# EAGLE board 2 (EAGLE 9.2.0)

Size 48.2 x 28 mm. Coordinates in mm from the lower left corner, seen from the top.
Outline: 0,0 48.2,0 48.2,28 0,28 0,0
Copper layers (1*16): Top 0.035mm / dielectric 1.5mm / Bottom 0.035mm
Design rules "default": minimum track width 6mil, minimum drill 0.35mm, track to track 6mil, track to pad 6mil, pad to pad 6mil, via to via 6mil, smd to smd 6mil, copper to edge 40mil, drill to drill 6mil, minimum pad ring 10mil, minimum via ring 8mil, stop-mask expansion 4mil, vias tented up to drill 0mil, thermal gap 10mil

## Footprints (pad centres in the part's own frame; a part is rotated, then mirrored left to right if it is on the bottom)
CAP-PTH-SMALL-KIT = drill 1.016 pad 2.032: 1 -1.397,0; 2 1.397,0
C2.5-3 = drill 0.813 pad 1.6 octagon: 1 -1.27,0; 2 1.27,0
QFN50P600X600X100-41N = smd 0.85 x 0.25: 1 -2.95,2.25; 2 -2.95,1.75; 3 -2.95,1.25; 4 -2.95,0.75; 5 -2.95,0.25; 6 -2.95,-0.25; 7 -2.95,-0.75; 8 -2.95,-1.25; 9 -2.95,-1.75; 10 -2.95,-2.25; 21 2.95,-2.25; 22 2.95,-1.75; 23 2.95,-1.25; 24 2.95,-0.75; 25 2.95,-0.25; 26 2.95,0.25; 27 2.95,0.75; 28 2.95,1.25; 29 2.95,1.75; 30 2.95,2.25 | smd 0.25 x 0.85: 11 -2.25,-2.95; 12 -1.75,-2.95; 13 -1.25,-2.95; 14 -0.75,-2.95; 15 -0.25,-2.95; 16 0.25,-2.95; 17 0.75,-2.95; 18 1.25,-2.95; 19 1.75,-2.95; 20 2.25,-2.95; 31 2.25,2.95; 32 1.75,2.95; 33 1.25,2.95; 34 0.75,2.95; 35 0.25,2.95; 36 -0.25,2.95; 37 -0.75,2.95; 38 -1.25,2.95; 39 -1.75,2.95; 40 -2.25,2.95 | smd 4.15 x 4.15: 41 0,0
1X1-HEADER-HOLE = drill 1.016 pad 1.778: 1 0,0
0204V = drill 0.813 octagon: 1 -1.27,0; 2 1.27,0

## Placement (x,y rotation side)
C1  1 uF  [CAP-PTH-SMALL-KIT]  22.57,14.98 180 top
C3  1 uF  [CAP-PTH-SMALL-KIT]  43.68,19.27 0 top
C4  0.1 uF  [CAP-PTH-SMALL-KIT]  43.73,16.39 0 top
C5  0.1 uF  [CAP-PTH-SMALL-KIT]  43.73,13.51 0 top
C6  0.1 uF  [CAP-PTH-SMALL-KIT]  43.73,10.68 0 top
C7  0.1 uF  [CAP-PTH-SMALL-KIT]  43.73,7.85 0 top
C8  0.1 uF  [CAP-PTH-SMALL-KIT]  43.73,5.12 180 top
C9  0.1 uF  [CAP-PTH-SMALL-KIT]  43.73,2.29 0 top
C10  1 uF  [CAP-PTH-SMALL-KIT]  22.44,11.93 180 top
C11  1 uF  [CAP-PTH-SMALL-KIT]  28.26,12.38 180 top
C12  150 pF  [CAP-PTH-SMALL-KIT]  19.35,22.11 180 top
C13  150 pF  [CAP-PTH-SMALL-KIT]  19.77,19.22 0 top
C14  0.022 uF  [CAP-PTH-SMALL-KIT]  21.24,8.95 180 top
C15  0.022 uF  [CAP-PTH-SMALL-KIT]  28.04,15.03 0 top
C16  1 uF  [CAP-PTH-SMALL-KIT]  25.34,21.98 180 top
C17  1 uF  [CAP-PTH-SMALL-KIT]  37.45,13.63 0 top
C18  10 nF  [CAP-PTH-SMALL-KIT]  33.07,15.53 270 top
C19  1uF  [C2.5-3]  17.85,6.8 180 top
IC1  CS43L22-CNZ  [QFN50P600X600X100-41N]  10.86,11.23 45 top
JP1  [1X1-HEADER-HOLE]  1.91,2.22 0 top
JP2  [1X1-HEADER-HOLE]  4.41,2.23 0 top
JP3  [1X1-HEADER-HOLE]  10.06,24.63 0 top
JP4  [1X1-HEADER-HOLE]  7.51,24.64 0 top
JP5  [1X1-HEADER-HOLE]  4.91,24.6 0 top
JP6  [1X1-HEADER-HOLE]  2.31,24.61 0 top
JP7  [1X1-HEADER-HOLE]  15.41,24.66 0 top
JP8  [1X1-HEADER-HOLE]  41.03,25.38 0 top
JP9  [1X1-HEADER-HOLE]  38.48,25.47 0 top
JP10  [1X1-HEADER-HOLE]  6.96,2.19 0 top
JP11  [1X1-HEADER-HOLE]  9.46,2.2 0 top
JP12  [1X1-HEADER-HOLE]  12.01,2.21 0 top
JP13  [1X1-HEADER-HOLE]  14.56,2.22 0 top
JP14  [1X1-HEADER-HOLE]  33.33,25.45 0 top
JP15  [1X1-HEADER-HOLE]  30.68,25.39 0 top
JP16  [1X1-HEADER-HOLE]  22.98,25.18 0 top
JP17  [1X1-HEADER-HOLE]  28.18,25.27 0 top
JP18  [1X1-HEADER-HOLE]  35.88,25.46 0 top
JP19  [1X1-HEADER-HOLE]  12.66,24.72 0 top
JP20  [1X1-HEADER-HOLE]  25.58,25.36 0 top
JP21  [1X1-HEADER-HOLE]  17.11,2.23 0 top
JP22  [1X1-HEADER-HOLE]  19.71,2.24 0 top
JP23  [1X1-HEADER-HOLE]  43.68,25.49 0 top
JP24  [1X1-HEADER-HOLE]  46.23,25.35 0 top
R2  51R  [0204V]  3.35,15.75 0 top
R4  100 ohm  [0204V]  14.02,18.68 0 top
R5  48R  [0204V]  19.08,25.77 0 top
R6  100 Kohm  [0204V]  19.22,24.46 0 top
R7  100 ohm  [0204V]  24.45,2.55 0 top
R8  1.2 Kohm  [0204V]  31.83,10.58 180 top
R9  100 Kohm  [0204V]  30.58,5.41 270 top
R10  55R  [0204V]  26.2,10.23 180 top
R11  49R  [0204V]  25.36,5.88 180 top
R12  51R  [0204V]  25.65,16.75 180 top
R13  10k  [0204V]  3.4,19.45 0 top

## Library data of the parts
C1 C3-C18 JP1-JP24 = F405Pill
C19 = capacitor-wima
IC1 = CS43L22-CNZ; DESCRIPTION: CS43L22-CNZ, Audio DAC 24 bit-, 96ksps Serial, 40-Pin QFN; HEIGHT: 1mm; MANUFACTURER_NAME: Cirrus Logic; MANUFACTURER_PART_NUMBER: CS43L22-CNZ; MOUSER_PART_NUMBER: 777-CS43L22-CNZ; MOUSER_PRICE-STOCK: https://www.mouser.com/Search/Refine.aspx?Keyword=777-CS43L22-CNZ; RS_PART_NUMBER: 7165851P; RS_PRICE-STOCK: http://uk.rs-online.com/web/p/products/7165851P
R2 R4-R13 = rcl; SPICEPREFIX: R

## Nets
3.3V: C3.2 C4.2 C5.2 C6.2 C7.2 C8.1 C9.2 IC1.5 IC1.8 IC1.13 IC1.16 IC1.33 IC1.34 JP24.1
GND: C1.1 C3.1 C4.1 C5.1 C6.1 C7.1 C8.2 C9.1 C10.2 C11.2 C12.1 C13.2 C18.1 IC1.3 IC1.17 IC1.31 IC1.35 IC1.41 JP8.1 JP9.1 JP23.1 R2.2 R6.1 R9.2 R12.2 R13.2
N$1: C19.2 IC1.11
N$2: IC1.1 JP1.1
N$3: IC1.2 JP2.1
N$4: IC1.37 JP3.1
N$5: IC1.38 JP4.1
N$6: IC1.39 JP5.1
N$7: IC1.40 JP6.1
N$8: IC1.32 JP7.1 R13.1
N$9: C1.2 IC1.10
N$10: C19.1 IC1.12
N$11: C11.1 IC1.19
N$12: C16.2 R4.2
N$13: C12.2 IC1.27
N$14: C13.1 IC1.28
N$15: C14.2 IC1.15
N$16: C10.1 IC1.18
N$17: C15.2 IC1.14
N$18: C14.1 R2.1
N$19: C15.1 R12.1
N$20: C16.1 R5.1 R6.2
N$21: IC1.4 JP10.1
N$22: IC1.6 JP11.1
N$23: IC1.7 JP12.1
N$24: IC1.9 JP13.1
N$25: IC1.26 JP17.1
N$26: IC1.25 JP16.1
N$27: IC1.24 JP15.1
N$28: IC1.23 JP14.1
N$29: IC1.36 JP19.1
N$30: IC1.20 JP18.1
N$31: IC1.29 IC1.30 R4.1
N$32: IC1.21 IC1.22 R7.1
N$33: C17.2 R7.2
N$34: JP20.1 R5.2
N$35: C17.1 C18.2 R8.1 R9.1 R11.1
N$36: R8.2 R10.1
N$37: JP21.1 R10.2
N$38: JP22.1 R11.2

## Tracks (layer width: path | path; a pad name or v marks a point on that pad's centre or on a via)
3.3V  (13 unrouted)
GND  (25 unrouted)
N$1  (1 unrouted)
N$2  (1 unrouted)
N$3  (1 unrouted)
N$4  (1 unrouted)
N$5  (1 unrouted)
N$6  (1 unrouted)
N$7  (1 unrouted)
N$8  (2 unrouted)
N$9  (1 unrouted)
N$10  (1 unrouted)
N$11  (1 unrouted)
N$12  (1 unrouted)
N$13  (1 unrouted)
N$14  (1 unrouted)
N$15  (1 unrouted)
N$16  (1 unrouted)
N$17  (1 unrouted)
N$18  (1 unrouted)
N$19  (1 unrouted)
N$20  (2 unrouted)
N$21  (1 unrouted)
N$22  (1 unrouted)
N$23  (1 unrouted)
N$24  (1 unrouted)
N$25  (1 unrouted)
N$26  (1 unrouted)
N$27  (1 unrouted)
N$28  (1 unrouted)
N$29  (1 unrouted)
N$30  (1 unrouted)
N$31  (2 unrouted)
N$32  (2 unrouted)
N$33  (1 unrouted)
N$34  (1 unrouted)
N$35  (4 unrouted)
N$36  (1 unrouted)
N$37  (1 unrouted)
N$38  (1 unrouted)